# Altium PCB ov_ftdi.PcbDoc (part 1 of 3)
Units mm, origin at the board's own origin, x right, y up, seen from the top; angles counter-clockwise.
Board outline 70.64 x 125.22 mm, 4 copper layers (Top Layer, Ground, Power, Bottom Layer), stack 1.565 mm thick; 150 components, 161 nets, 670 pads, 245 vias.
Unrouted connection lines stored in the file: 2.
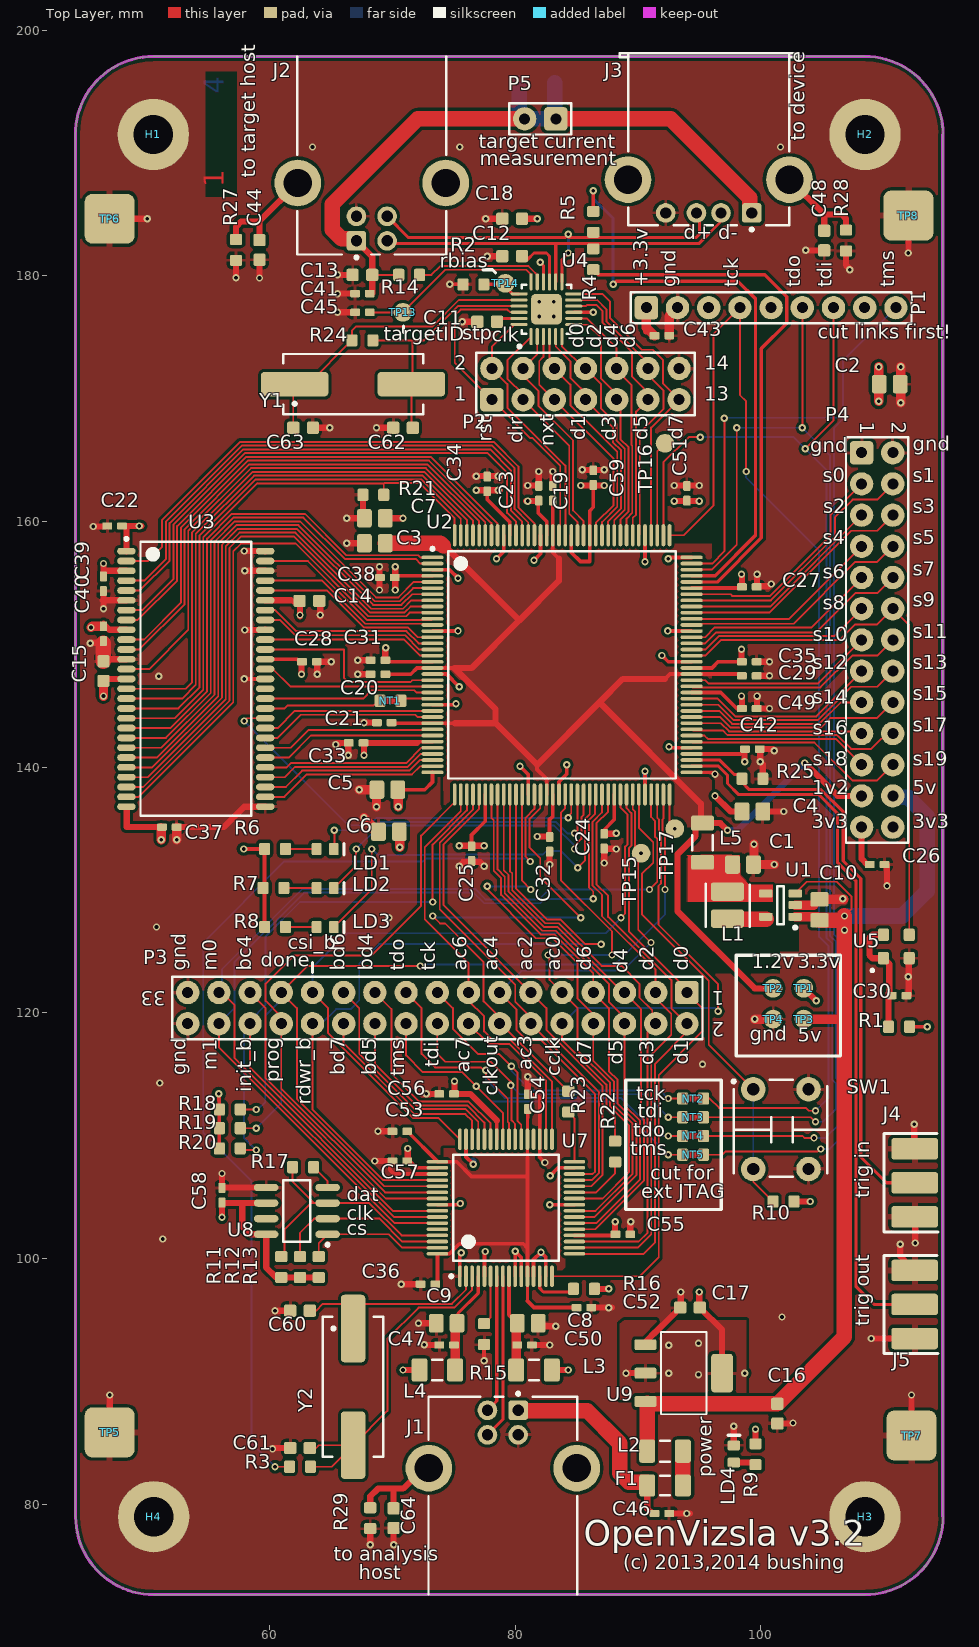
[diagram p0: Top Layer view]
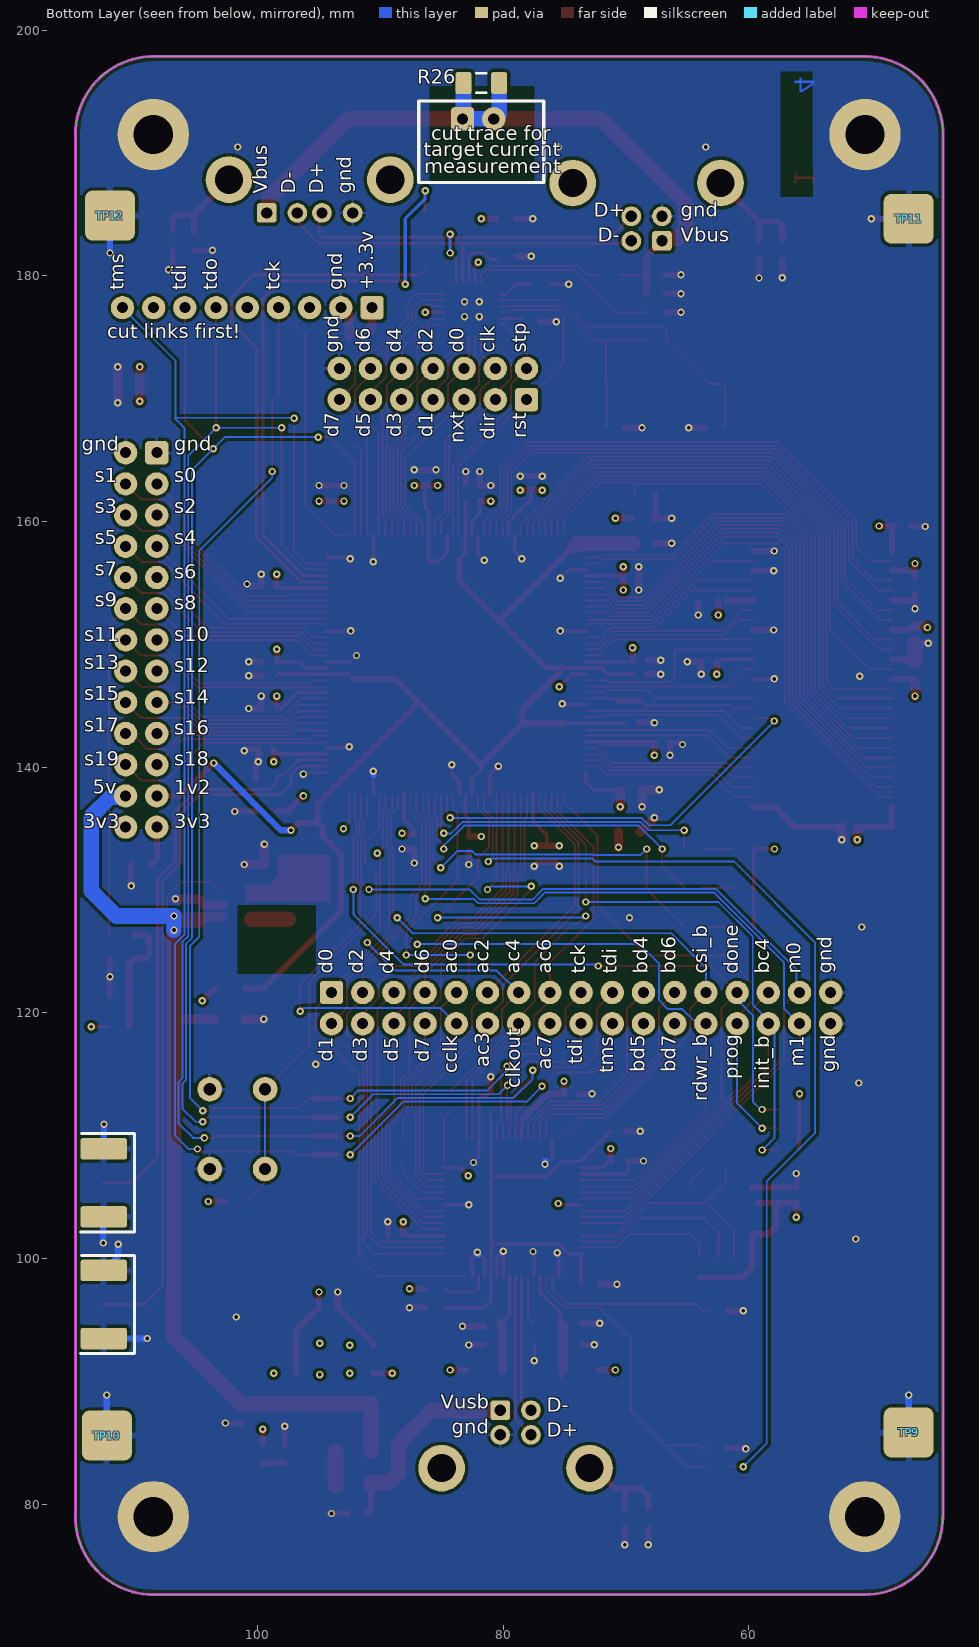
[diagram p1: Bottom Layer view, seen from below]
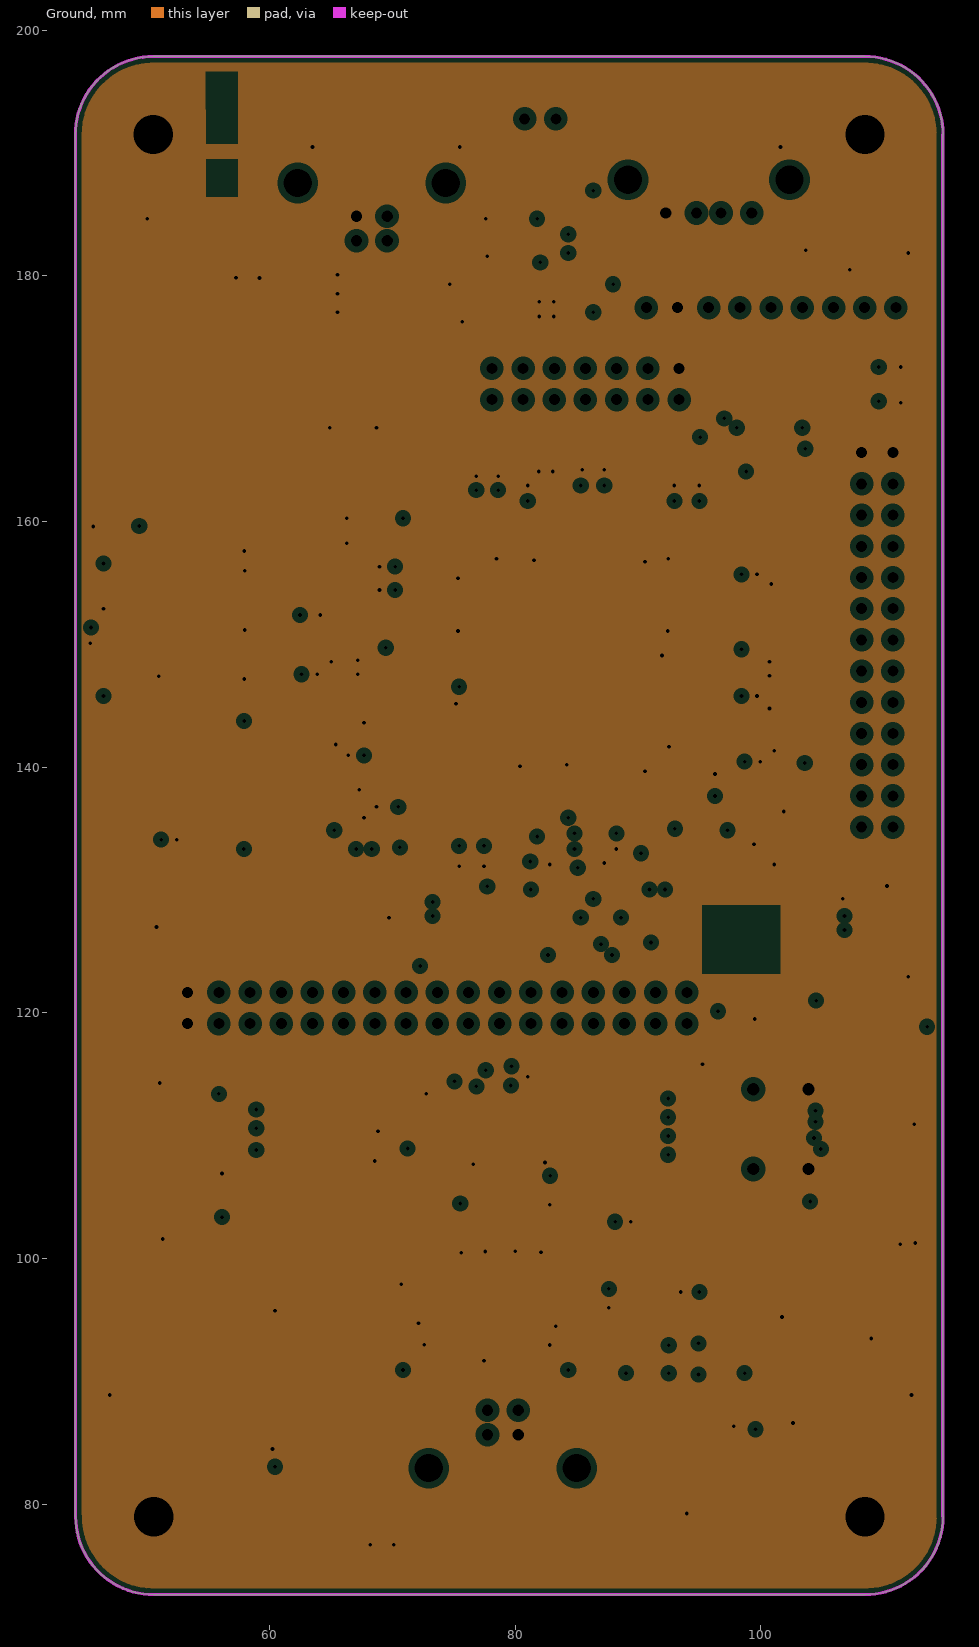
[diagram p2: Ground, clearances drawn from the general rule]
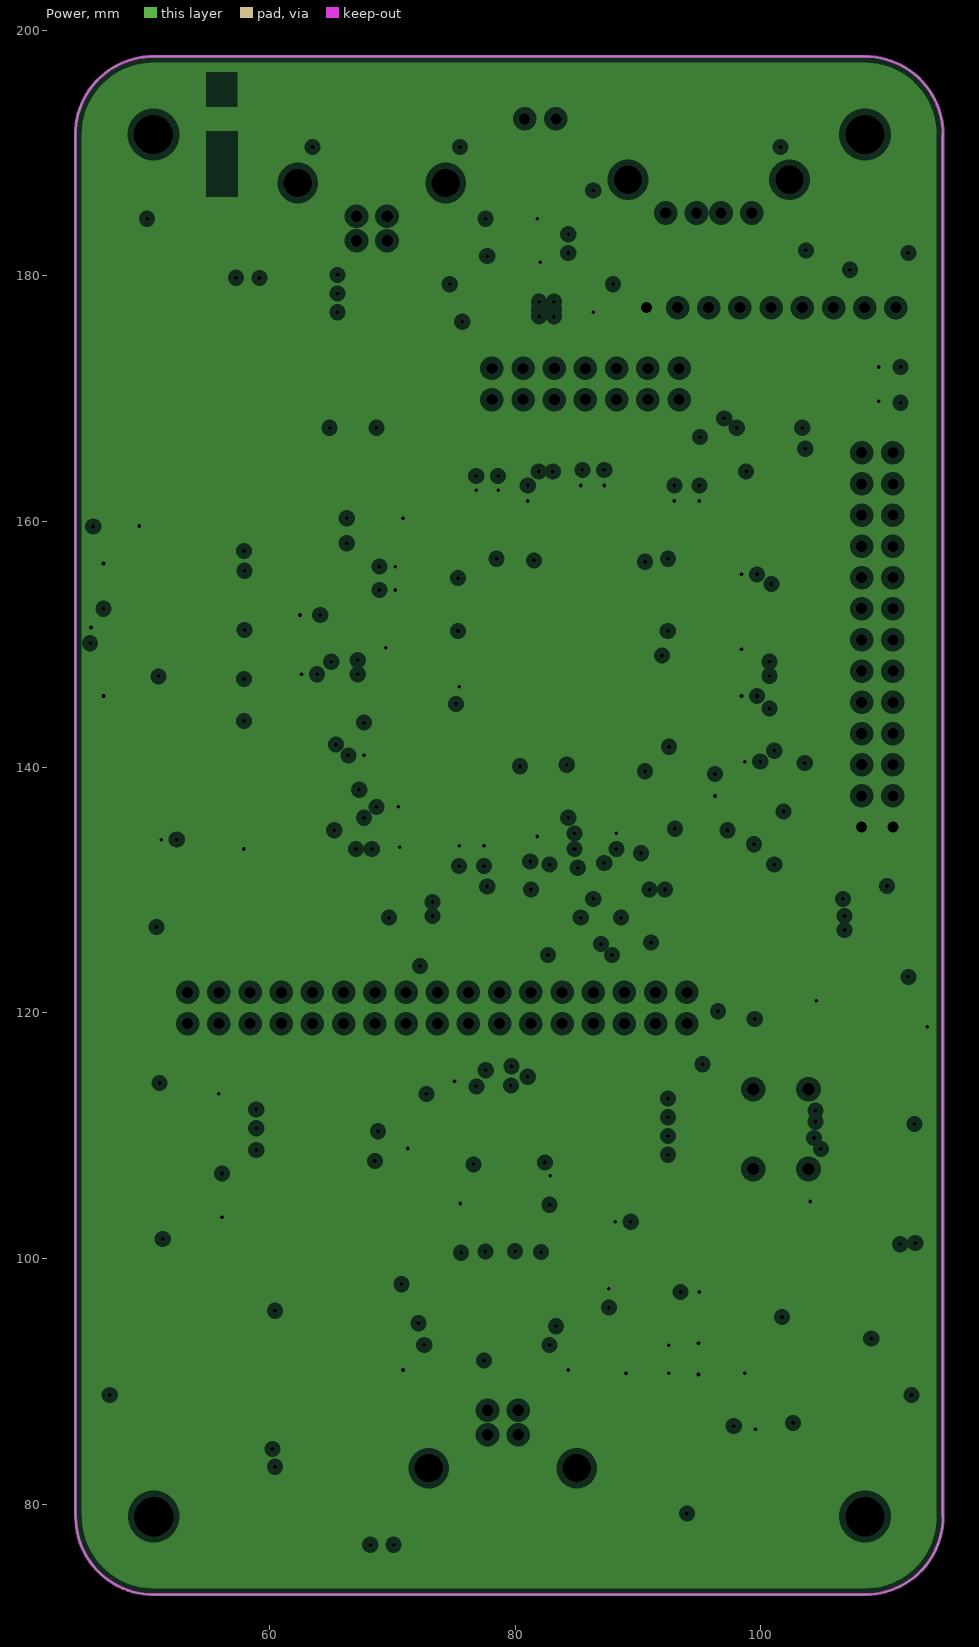
[diagram p3: Power, clearances drawn from the general rule]

## Layer stack, top to bottom
Top Solder: solder mask 0.0102, Solder Resist, Dk 3.5
Top Layer: signal copper 0.0356
Dielectric1: prepreg 0.2032, FR-4, Dk 4.8
Ground: plane copper 0.0356, net GND
Dielectric3: core 1.016, FR-4, Dk 4.8
Power: plane copper 0.0356, net +3.3V
Dielectric2: prepreg 0.2032, FR-4, Dk 4.8
Bottom Layer: signal copper 0.0356
Bottom Solder: solder mask 0.0102, Solder Resist, Dk 3.5

## Board outline
44.196,78.994 44.196,191.491 cw(c50.546,191.516) 50.546,197.866 108.458,197.866 cw(c108.483,191.516) 114.833,191.516 114.808,191.516 114.808,79.019 114.833,79.019 cw(c108.483,78.994) 108.483,72.644 50.596,72.644 cw(c50.571,78.994)

## Design rules (kind name [scope] priority, off if disabled: settings)
Clearance "Poly clearance" [All vs IsRegion] p1: gap=0.254 ignorepadtopadclearanceinfootprint=FALSE except(0: Arc-Hole Track-Hole SMDPad-Hole THPad-Hole Via-Hole Fill-Hole Poly-Hole Region-Hole Text-Hole)
Clearance [All] p2: gap=0.152 ignorepadtopadclearanceinfootprint=FALSE except(0: Arc-Hole Track-Hole SMDPad-Hole THPad-Hole Via-Hole Fill-Hole Poly-Hole Region-Hole Text-Hole)
DiffPairsRouting [All] p1: maxlimit=0.254 minlimit=0.127 mostfreqgap=0.254 toplayer_minwidth=0.381 toplayer_maxwidth=0.381 toplayer_prefwidth=0.381 bottomlayer_minwidth=0.381 bottomlayer_maxwidth=0.381 bottomlayer_prefwidth=0.381 maxuncoupledlength=12.7
FabricationTestPointUsage [All] p1 off: valid=0 allowmultiple=FALSE
FabricationTestpoint [All] p1 off: side=3 testpointundercomponent=TRUE minsize=1.016 maxsize=2.54 preferedsize=1.524 minholesize=0 maxholesize=1.016 preferedholesize=0.813 testpointgrid=0.025 allowsidetop=TRUE allowsidebottom=TRUE usegrid=TRUE gridtolerance=0
HoleSize [All] p1: absolutevalues=TRUE maxlimit=3.81 minlimit=0.025 maxpercent=80.000 minpercent=20.000
MinimumSolderMaskSliver [All] p1: minsoldermaskwidth=0.076
PlaneClearance [All] p1: clearance=0.508
PlaneConnect "PlaneConnect via" [IsVia] p1: planeconnectstyle=Direct reliefexpansion=0.508 reliefentries=4 reliefconductorwidth=0.254 reliefairgap=0.254
PlaneConnect [All] p2: planeconnectstyle=Relief reliefexpansion=0.508 reliefentries=4 reliefconductorwidth=0.254 reliefairgap=0.254
PolygonConnect PolygonConnect_betterthermals [(ObjectKind = 'Pad') And ((Component = 'J4') or (Component = 'J5') or (Component = 'TP5') or (Component = 'TP6') or (Component = 'TP7') or (Component = 'TP8') or (Component = 'TP9') or (Component = 'TP10') or (Component = 'TP11') or (Component = 'TP12'))] p1: connectstyle=Relief reliefconductorwidth=0.508 reliefentries=4 polygonreliefangle="90 Angle" airgapwidth=0.254
PolygonConnect PolygonConnect_mounting_hole [(ObjectKind = 'Pad') And ((Component = 'H1')  or (Component = 'H2') or (Component = 'H3') or (Component = 'H4'))] p2: connectstyle=Direct reliefconductorwidth=0.254 reliefentries=4 polygonreliefangle="90 Angle" airgapwidth=0.254
PolygonConnect "PolygonConnect via" [IsVia] p3: connectstyle=Direct reliefconductorwidth=0.254 reliefentries=4 polygonreliefangle="90 Angle" airgapwidth=0.254
PolygonConnect "PolygonConnect C1_2 and 1.2v" [(InNet('+1.2V') OR InNet('NetC1_2'))] p4: connectstyle=Direct reliefconductorwidth=0.254 reliefentries=4 polygonreliefangle="90 Angle" airgapwidth=0.254
PolygonConnect [All] p5: connectstyle=Relief reliefconductorwidth=0.254 reliefentries=4 polygonreliefangle="90 Angle" airgapwidth=0.254
RoomDefinition "FPGA power v3" [InComponentClass('FPGA power v3')] p1 off: confinementstyle=ConfineIn formatcopy=TRUE lockcomponents=FALSE outline 0,0 114.427,0 114.427,198.374 0,198.374
RoomDefinition usb [InComponentClass('usb')] p2 off: confinementstyle=ConfineIn formatcopy=TRUE lockcomponents=FALSE outline 70.485,107.569 98.806,107.569 98.806,129.667 70.485,129.667
RoomDefinition "RAM and target USB" [InComponentClass('RAM and target USB')] p3 off: confinementstyle=ConfineIn formatcopy=TRUE lockcomponents=FALSE outline 51.816,123.571 124.841,123.571 124.841,166.116 51.816,166.116
RoomDefinition power [InComponentClass('power')] p4 off: confinementstyle=ConfineIn formatcopy=TRUE lockcomponents=FALSE outline 115.443,104.14 153.289,104.14 153.289,122.301 115.443,122.301
RoomDefinition fpga [InComponentClass('fpga')] p5 off: confinementstyle=ConfineIn formatcopy=TRUE lockcomponents=FALSE outline 53.721,77.724 143.383,77.724 143.383,167.894 53.721,167.894
RoutingVias [All] p1: holewidth=0.3 width=0.6 viastyle="Through Hole" minholewidth=0.3 minwidth=0.6 maxholewidth=0.3 maxwidth=0.6
SilkToSilkClearance [All] p1: silktosilkclearance=0.203
SilkToSolderMaskClearance SilkscreenOverSoldermask [All] p1: minsilkscreentomaskgap=0.102 clearancetoexposedcopper=FALSE
SolderMaskExpansion SolderMaskExpansion_via [IsVia] p1: expansion=0 istentingtop=FALSE
SolderMaskExpansion [All] p2: expansion=0.102 istentingtop=FALSE
Width "usb width" [InNetClass('USB')] p1: maxlimit=0.305 minlimit=0.152 preferedwidth=0.152 minimp=80.000000 maximp=110.000000 favimp=90.000000
Width [All] p2: maxlimit=1.27 minlimit=0.152 preferedwidth=0.152 minimp=50.000000 maximp=50.000000 favimp=50.000000
21 further rules are at their usual default settings.

## Classes and differential pairs
net class Power: +1.2V +1.8V +3.3V +5V GND TARGETVBUS VPHY VPLL VUSB
component class usb: C8 C9 C36 C46 C47 C50 C52 C53 C54 C55 C56 C57 C58 C60 C61 C64 J1 L3 L4 NT2 NT3 NT4 NT5 P3 R11 R12 R13 R15 R16 R17 R18 R19 R20 R21 R22 R23 R29 U7 U8 Y2
component class "RAM and target USB": C11 C12 C13 C14 C15 C18 C22 C28 C37 C39 C40 C41 C44 C45 C48 C62 C63 J2 J3 NT1 P2 P5 R2 R4 R5 R14 R24 R26 R27 R28 TP13 TP14 U3 U4 Y1
component class power: C1 C10 C16 C17 F1 L1 L2 L5 TP1 TP2 TP3 TP4 TP5 TP6 TP7 TP8 TP9 TP10 TP11 TP12 U1 U9
component class fpga: C30 J4 J5 LD1 LD2 LD3 LD4 P1 P4 R1 R3 R6 R7 R8 R9 R10 R25 SW1 TP15 TP16 TP17 U2 U5
component class "FPGA power v3": C2 C3 C4 C5 C6 C7 C19 C20 C21 C23 C24 C25 C26 C27 C29 C31 C32 C33 C34 C35 C38 C42 C43 C49 C51 C59 H1 H2 H3 H4
net class USB: TARGETD_N TARGETD_P TARGETDTAP_N TARGETDTAP_P
differential pair USB: +USB_P -USB_N
differential pair TARGETD: +TARGETD_P -TARGETD_N
differential pair TARGETDTAP: +TARGETDTAP_P -TARGETDTAP_N

## Components (designator, comment, footprint, x,y, rotation, side; value= is the part's Value field where it differs from the comment)
C1 "Cap Semi" CAPC2012N 98.552,132.08 r180 top value=10uF
C2 "Cap Semi" CAPC2012N 110.49,171.196 r180 top value=10uF
C3 "Cap Semi" CAPC2012N 68.58,158.242 r0 top value=10uF
C4 "Cap Semi" CAPC2012N 99.314,136.398 r180 top value=10uF
C5 "Cap Semi" CAPC2012N 69.596,138.176 r0 top value=10uF
C6 "Cap Semi" CAPC2012N 69.723,134.747 r0 top value=10uF
C7 "Cap Semi" CAPC2012N 68.58,160.274 r0 top value=10uF
C8 "Cap Semi" CAPC2012N 81.026,94.742 r180 top value=4.7uF
C9 "Cap Semi" CAPC2012N 74.422,94.742 r0 top value=4.7uF
C10 "Cap Semi" CAPC2012N 104.775,128.397 r270 top value=4.7uF
C11 "Cap Semi" CAPC1608N 77.724,176.276 r180 top value=1uF
C12 "Cap Semi" CAPC1608N 79.756,181.61 r180 top value=1uF
C13 "Cap Semi" CAPC1608N 67.564,180.086 r0 top value=1uF
C14 "Cap Semi" CAPC1608N 63.246,153.543 r180 top value=1uF
C15 "Cap Semi" CAPC1608N 46.482,147.828 r270 top value=1uF
C16 "Cap Semi" CAPC1608N 101.346,87.376 r90 top value=1uF
C17 "Cap Semi" CAPC1608N 94.234,96.012 r0 top value=1uF
C18 "Cap Semi" CAPC1608N 79.756,184.658 r180 top value=1uF
C19 "Cap Semi" CAPC1005N 83.058,162.306 r270 top value=0.1uF
C20 "Cap Semi" CAPC1005N 68.834,147.574 r0 top value=0.1uF
C21 "Cap Semi" CAPC1005N 69.342,143.637 r0 top value=0.1uF
C22 "Cap Semi" CAPC1005N 47.396,159.639 r0 top value=0.1uF
C23 "Cap Semi" CAPC1005N 81.915,162.306 r270 top value=0.1uF
C24 "Cap Semi" CAPC1005N 87.249,133.985 r90 top value=0.1uF
C25 "Cap Semi" CAPC1005N 76.454,132.969 r90 top value=0.1uF
C26 "Cap Semi" CAPC1005N 109.474,132.08 r180 top value=0.1uF
C27 "Cap Semi" CAPC1005N 99.06,154.686 r180 top value=0.1uF
C28 "Cap Semi" CAPC1005N 63.246,148.59 r180 top value=0.1uF
C29 "Cap Semi" CAPC1005N 99.06,147.447 r180 top value=0.1uF
C30 "Cap Semi" CAPC1005N 111.252,121.412 r180 top value=0.1uF
C31 "Cap Semi" CAPC1005N 68.834,148.717 r0 top value=0.1uF
C32 "Cap Semi" CAPC1005N 82.804,133.731 r90 top value=0.1uF
C33 "Cap Semi" CAPC1005N 67.056,141.986 r0 top value=0.1uF
C34 "Cap Semi" CAPC1005N 77.724,163.068 r270 top value=0.1uF
C35 "Cap Semi" CAPC1005N 99.06,148.59 r180 top value=0.1uF
C36 "Cap Semi" CAPC1005N 72.898,97.917 r0 top value=0.1uF
C37 "Cap Semi" CAPC1005N 51.841,135.128 r180 top value=0.1uF
C38 "Cap Semi" CAPC1005N 69.596,155.448 r0 top value=0.1uF
C39 "Cap Semi" CAPC1005N 46.482,154.94 r90 top value=0.1uF
C40 "Cap Semi" CAPC1005N 46.482,150.876 r90 top value=0.1uF
C41 "Cap Semi" CAPC1005N 67.564,178.562 r0 top value=0.1uF
C42 "Cap Semi" CAPC1005N 99.314,141.478 r180 top value=0.1uF
C43 "Cap Semi" CAPC1005N 91.948,175.133 r180 top value=0.1uF
C44 "Cap Semi" CAPC1608N 59.182,182.118 r90 top value=0.1uF
C45 "Cap Semi" CAPC1005N 67.564,177.038 r180 top value=0.1uF
C46 "Cap Semi" CAPC1005N 91.948,79.248 r180 top value=0.1uF
C47 "Cap Semi" CAPC1005N 74.422,92.964 r0 top value=0.1uF
C48 "Cap Semi" CAPC1608N 105.156,182.88 r90 top value=0.1uF
C49 "Cap Semi" CAPC1005N 99.06,144.78 r180 top value=0.1uF
C50 "Cap Semi" CAPC1005N 80.772,92.964 r180 top value=0.1uF
C51 "Cap Semi" CAPC1005N 93.98,162.306 r270 top value=0.1uF
C52 "Cap Semi" CAPC1005N 85.598,96.012 r180 top value=0.1uF
C53 "Cap Semi" CAPC1005N 70.612,110.363 r0 top value=0.1uF
C54 "Cap Semi" CAPC1005N 81.026,112.776 r270 top value=0.1uF
C55 "Cap Semi" CAPC1005N 88.773,101.981 r180 top value=0.1uF
C56 "Cap Semi" CAPC1005N 74.422,113.411 r0 top value=0.1uF
C57 "Cap Semi" CAPC1005N 70.612,107.95 r0 top value=0.1uF
C58 "Cap Semi" CAPC1005N 56.134,105.156 r270 top value=0.1uF
C59 "Cap Semi" CAPC1005N 86.36,163.576 r270 top value=0.1uF
C60 "Cap Semi" CAPC1608N 62.484,95.758 r0 top value=18pF
C61 "Cap Semi" CAPC1608N 62.484,84.582 r0 top value=18pF
C62 "Cap Semi" CAPC1608N 70.866,167.64 r0 top value=18pF
C63 "Cap Semi" CAPC1608N 62.738,167.64 r180 top value=18pF
C64 "Cap Semi" CAPC1608N 70.104,78.867 r90 top value=0.1uF
F1 "500mA resettable polyfuse" RESC3216N 92.202,81.534 r0 top value=0
H1 "MHole3.2mm" "MOUNTING HOLE"#1 50.546,191.516 r0 top
H2 "MHole3.2mm" "MOUNTING HOLE"#2 108.458,191.516 r0 top
H3 "MHole3.2mm" "MOUNTING HOLE"#2 108.458,78.994 r0 top
H4 "MHole3.2mm" "MOUNTING HOLE"#2 50.546,78.994 r0 top
J1 "1-1470156-1" 1-1470156 78.994,72.644 r270 top value=61729-1011BLF
J2 "1-1470156-1" 1-1470156 68.326,197.866 r90 top value=61729-1011BLF
J3 "787616-1" 787616 95.758,198.12 r90 top value=E27-AC54-100
J4 "Trigger in" EMPCB.SMAFSTJ.C.HT 112.522,106.172 r90 top
J5 "Trigger out" EMPCB.SMAFSTJ.C.HT 112.522,96.266 r90 top
L1 "3x3mm power inductor" "3X3MM INDUCTOR" 97.282,128.778 r90 top value=4.7uH
L2 "ferrite bead" INDC3216AN 92.202,84.328 r0 top value=0
L3 "ferrite bead" INDC3216AN 81.534,90.932 r180 top value=0
L4 "ferrite bead" INDC3216AN 73.66,90.932 r0 top value=0
L5 "ferrite bead" INDC3216N 95.25,133.858 r270 top value=0
LD1 "RED-LED" "LED 0603" 64.516,133.35 r90 top value=red
LD2 "RED-LED" "LED 0603" 64.516,130.175 r90 top value=yel
LD3 "RED-LED" "LED 0603" 64.516,127 r90 top value=grn
LD4 "GREEN-LED" "LED 0603" 97.79,84.074 r180 top value=green
NT1 "Net Tie2" "NetTie 0603" 69.85,145.415 r180 top net-tie
NT2 "Net Tie2" "NetTie 0603" 94.488,113.03 r0 top net-tie
NT3 "Net Tie2" "NetTie 0603" 94.488,111.506 r0 top net-tie
NT4 "Net Tie2" "NetTie 0603" 94.488,109.982 r0 top net-tie
NT5 "Net Tie2" "NetTie 0603" 94.488,108.458 r0 top net-tie
P1 "Header 9" HDR1X9 90.678,177.419 r0 top
P2 "Header 7X2" HDR2X7 78.105,169.926 r0 top
P3 "Header 17X2" HDR2X17 93.98,121.666 r180 top
P4 "Header 13X2" HDR2X13 108.204,165.608 r270 top
P5 "Current measurement" HDR1X2 83.312,192.786 r180 top
R1 "Res Semi" RESC1608N 111.252,118.872 r180 top value=10
R2 "Res Semi" RESC1608N 76.6,179.3 r0 top value=8.06K
R3 "Res Semi" RESC1608N 62.484,83.058 r180 top value=100
R4 "Res Semi" RESC1608N 86.36,181.356 r270 top value=1K
R5 "Res Semi" RESC1608N 86.36,184.404 r90 top value=1K
R6 "Res Semi" RESC1608N 60.452,133.35 r180 top value=330
R7 "Res Semi" RESC1608N 60.325,130.175 r180 top value=330
R8 "Res Semi" RESC1608N 60.452,127 r180 top value=330
R9 "Res Semi" RESC1608N 99.568,84.074 r90 top value=330
R10 "Res Semi" RESC1608N 101.854,104.648 r0 top value=10K
R11 "Res Semi" RESC1608N 60.96,99.314 r270 top value=10K
R12 "Res Semi" RESC1608N 62.484,99.314 r270 top value=10K
R13 "Res Semi" RESC1608N 64.008,99.314 r270 top value=10K
R14 "Res Semi" RESC1608N 71.374,180.086 r180 top value=10K
R15 "Res Semi" RESC1608N 77.47,93.853 r270 top value="12K 1%"
R16 "Res Semi" RESC1608N 85.598,97.536 r180 top value=2.2K
R17 "Res Semi" RESC1608N 62.738,107.442 r180 top value=2.2K
R18 "Res Semi" RESC1608N 56.769,112.141 r180 top value=330
R19 "Res Semi" RESC1608N 56.769,110.617 r0 top value=10K
R20 "Res Semi" RESC1608N 56.769,108.966 r0 top value=10K
R21 "Res Semi" RESC1608N 68.453,162.179 r0 top value=10K
R22 "Res Semi" RESC1608N 88.138,108.712 r90 top value=33
R23 "Res Semi" RESC1608N 84.328,112.776 r90 top value=33
R24 "Res Semi" RESC1608N 67.564,174.752 r180 top value=1M
R25 "Res Semi" RESC1608N 99.314,139.065 r0 top value=50
R26 "Res Semi" RESC3216N 81.788,195.707 r0 bottom value="DNP (0)"
R27 "Res Semi" RESC1608N 57.277,182.118 r270 top value=1M
R28 "Res Semi" RESC1608N 106.934,182.88 r270 top value=1M
R29 "Res Semi" RESC1608N 68.199,78.867 r270 top value=1M
SW1 "4pin button" TL1105 103.886,113.792 r270 top value="TL1105LF160Q or TL1105F160Q"
TP1 "3.3v" testpoint-60mil 103.5,122 r90 top
TP2 "1.2v" testpoint-60mil 101,122 r90 top
TP3 "5v" testpoint-60mil 103.5,119.5 r0 top
TP4 "gnd" testpoint-60mil 101,119.5 r270 top
TP5 "" "ground pad" 46.99,85.852 r0 top
TP6 "" "ground pad" 46.99,184.658 r0 top
TP7 "" "ground pad" 112.268,85.598 r0 top
TP8 "" "ground pad" 112.014,184.912 r0 top
TP9 "" "ground pad" 46.99,85.852 r180 bottom
TP10 "" "ground pad" 112.268,85.598 r180 bottom
TP11 "" "ground pad" 46.99,184.658 r180 bottom
TP12 "" "ground pad" 112.014,184.912 r180 bottom
TP13 "TP14" testpoint-60mil 70.866,177.038 r180 top
TP14 "TP14" testpoint-60mil 79.2,179.4 r180 top
TP15 "TP14" testpoint-60mil 90.25,133 r90 top
TP16 "TP14" testpoint-60mil 92.202,166.37 r90 top
TP17 "TP14" testpoint-60mil 93,135 r90 top
U1 "LM3670MF-1.2/NOPB" SOT23-5AN 101.6,128.778 r180 top value=LM3670MF-1.2
U2 "XC6SLX9-3TQG144C" TQG144_N 83.82,148.336 r0 top
U3 "MT48LC16M16A2P-75" TSOP2-54_N 54,147.193 r0 top
U4 "USB3343" "SMSC USB334X QFN24" 82.55,177.292 r90 top
U5 "" "ASEMB 3.2x2.5 oscillator" 109.982,124.46 r0 top value=50MHz
U7 "Component_1" SQFP50P1200X1200X180-64N 79.248,104.14 r90 top value=FT2232H
U8 "M93C46WMN1" SOP8_N 62.23,103.886 r180 top
U9 "TLV1117LV33" DCY4 93.726,90.678 r270 top
Y1 "26MHz" HC49/4H_SMX 66.802,171.196 r0 top value="26 MHz"
Y2 "12MHz" HC49/4H_SMX 66.802,89.56 r270 top value="12 MHz"

## Footprints (in the part's own frame and the unit in brackets; to place one, negate y for a bottom-side part, rotate by r counter-clockwise, add the part's x,y. Pads: shape width x height; smd on the part's side, far side on the other; paste and mask are expansions set on the pad)
1-1470156 [mm] "Connector; USB1.1, Type B, Thru-Hole; 4 Position; Right Angle"
  rrect30% 1.6x1.6 hole 0.92: 1(-15.01,1.25)
  round 1.6 hole 0.92: 2(-15.01,-1.25) 3(-13.01,-1.25) 4(-13.01,1.25)
  round 3.8 hole 2.3: 5(-10.3,6.02) 6(-10.3,-6.02)
  silkscreen extent -16.48,-6.05 -0.02,6.05
"3X3MM INDUCTOR" [mm] "3x3mm inductor"
  rrect30% 1.5x2.7 smd: 1(-1.1,0) 2(1.1,0)
  silkscreen extent -1.78,-1.8 1.72,1.78, body extent -1.63,-1.43 1.53,1.53, height 3
787616 [mm] "Connector; USB1.1, Type A, Thru-Hole; 4 Position; Right Angle"
  rrect30% 1.6x1.6 hole 0.92: 1(-12.99,-3.5)
  round 1.6 hole 0.92: 2(-12.99,-1) 3(-12.99,1) 4(-12.99,3.5)
  round 3.8 hole 2.3: 5(-10.28,6.57) 6(-10.28,-6.57)
  silkscreen extent -14.46,-7.25 0,7.25
"ASEMB 3.2x2.5 oscillator" [mm]
  rrect30% 0.9x1 smd: 1(0,0) 2(2.1,0) 3(2.1,1.9) 4(0,1.9)
  silkscreen extent -1,-1.1 -0.8,-0.9
CAPC1005N [mm] "Chip Capacitor, Body 1.0x0.5mm, IPC Medium Density"
  rrect30% 0.8x0.6 smd: 1(-0.6,0) 2(0.6,0)
  body extent -0.55,-0.3 0.55,0.3, height 0.6
CAPC1608N [mm]
  rrect30% 1x1 smd: 1(-0.8,0) 2(0.8,0)
  body extent -0.87,-0.48 0.87,0.48, height 0.85
CAPC2012N [mm] "Chip Capacitor, Body 2.0x1.3mm, IPC Medium Density"
  rrect30% 1.2x1.5 smd: 1(-0.85,0) 2(0.85,0)
  body extent -1.1,-0.72 1.1,0.72, height 1.1
DCY4 [mil]
  rrect30% 35x69.5 smd: 1(-91,-122.75) 2(0,-122.75) 3(91,-122.75)
  rrect30% 124x69.5 smd: 4(0,122.75)
  silkscreen extent -132,-73 132,73
EMPCB.SMAFSTJ.C.HT [mm]
  rrect25% 1.75x3.8 smd: 1(0,0) 2(-2.77,0) 3(2.77,0)
  rrect25% 1.75x3.8 smd far side: 4(-2.77,0) 5(2.77,0)
  silkscreen extent -4,-1.9 4,2.5
"ground pad" [mil]
  rrect30% 160x160 smd: 1(0,0)
HC49/4H_SMX [mm] "Surface Mount Quartz Crystal; Body 13.4 (inc. leads) x 4.9 mm (LxW max)"
  rrect30% 5.5x2 smd: 1(-4.75,0) 2(4.75,0)
  silkscreen extent -5.7,-2.45 5.7,2.45
HDR1X2 [mm] "Connector; Header; 2 Position"
  rrect30% 1.9x1.9 hole 0.9: 1(0,0)
  round 1.9 hole 0.9: 2(2.54,0)
  silkscreen extent -1.27,-1.27 3.81,1.27
HDR1X9 [mm] "Connector; Header; 9 Position"
  rrect30% 1.9x1.9 hole 0.9: 1(0,0)
  round 1.9 hole 0.9: 2(2.54,0) 3(5.08,0) 4(7.62,0) 5(10.16,0) 6(12.7,0) 7(15.24,0) 8(17.78,0) 9(20.32,0)
  silkscreen extent -1.27,-1.27 21.59,1.27
HDR2X7 [mm] "Connector; Header; 7x2 Position"
  rrect30% 1.9x1.9 hole 0.9: 1(0,0)
  round 1.9 hole 0.9: 2(0,2.54) 3(2.54,0) 4(2.54,2.54) 5(5.08,0) 6(5.08,2.54) 7(7.62,0) 8(7.62,2.54) 9(10.16,0) 10(10.16,2.54) 11(12.7,0) 12(12.7,2.54) 13(15.24,0) 14(15.24,2.54)
  silkscreen extent -1.27,-1.27 16.51,3.81
HDR2X13 [mm] "Connector; Header; 13x2 Position"
  rrect30% 1.9x1.9 hole 0.9: 1(0,0)
  round 1.9 hole 0.9: 2(0,2.54) 3(2.54,0) 4(2.54,2.54) 5(5.08,0) 6(5.08,2.54) 7(7.62,0) 8(7.62,2.54) 9(10.16,0) 10(10.16,2.54) 11(12.7,0) 12(12.7,2.54) 13(15.24,0) 14(15.24,2.54) 15(17.78,0) 16(17.78,2.54) 17(20.32,0) 18(20.32,2.54) 19(22.86,0) 20(22.86,2.54) 21(25.4,0) 22(25.4,2.54) 23(27.94,0) 24(27.94,2.54) 25(30.48,0) 26(30.48,2.54)
  silkscreen extent -1.27,-1.27 31.75,3.81
HDR2X17 [mm] "Connector; Header; 17x2 Position"
  rrect30% 1.9x1.9 hole 0.9: 1(0,0)
  round 1.9 hole 0.9: 2(0,2.54) 3(2.54,0) 4(2.54,2.54) 5(5.08,0) 6(5.08,2.54) 7(7.62,0) 8(7.62,2.54) 9(10.16,0) 10(10.16,2.54) 11(12.7,0) 12(12.7,2.54) 13(15.24,0) 14(15.24,2.54) 15(17.78,0) 16(17.78,2.54) 17(20.32,0) 18(20.32,2.54) 19(22.86,0) 20(22.86,2.54) 21(25.4,0) 22(25.4,2.54) 23(27.94,0) 24(27.94,2.54) 25(30.48,0) 26(30.48,2.54) 27(33.02,0) 28(33.02,2.54) 29(35.56,0) 30(35.56,2.54) 31(38.1,0) 32(38.1,2.54) 33(40.64,0) 34(40.64,2.54)
  silkscreen extent -1.27,-1.27 41.91,3.81
INDC3216AN [mm] "Chip Inductor, Body 3.2x1.6mm, IPC Medium Density"
  rrect30% 1.3x1.9 smd: 1(-1.45,0) 2(1.45,0)
  silkscreen extent -0.4,-0.85 0.4,0.85, body extent -1.7,-0.9 1.7,0.9, height 1.3
INDC3216N [mm] "Chip Inductor, Body 3.2x1.6mm, IPC Medium Density"
  rrect30% 1.2x1.9 smd: 1(-1.6,0) 2(1.6,0)
  silkscreen extent -0.6,-0.85 0.6,0.85, body extent -1.75,-0.95 1.75,0.95, height 1.9
"LED 0603" [mm]
  rrect30% 1x0.8 smd: A(-0.01,0.68) C(-0.01,-0.72)
  silkscreen extent -0.5,-1.55 0.45,-1.55, body extent -0.39,-0.83 0.4,0.79, height 0.75
"MOUNTING HOLE"#1 [mm] "mounting hole"
  round 5.8 hole 3.2: 1(0,0)
  round 3.2 on Mech2: 1(0,0)
  body extent -3.8,-3.7 3.7,3.8, height 2.33
"MOUNTING HOLE"#2 [mm] "mounting hole"
  round 5.8 hole 3.2: 1(0.025,0)
  round 3.2 on Mech2: 1(0.025,0)
  body extent -3.8,-3.7 3.7,3.8, height 2.33
"NetTie 0603" [mm] "0603-footprint Net Tie"
  rrect30% 0.9x1 smd paste-2.54: 1(-0.85,0) 2(0.85,0)
  Top Layer lines w0.508: 0.85,0 -0.85,0
RESC1608N [mm] "Chip Resistor, Body 1.6x0.8mm, IPC Medium Density"
  rrect30% 0.9x1 smd: 1(-0.85,0) 2(0.85,0)
  body extent -0.85,-0.48 0.85,0.48, height 0.6
RESC3216N [mm] "Chip Resistor, Body 3.2x1.6mm, IPC Medium Density"
  rrect30% 1.3x1.8 smd: 1(-1.45,0) 2(1.45,0)
  silkscreen extent -0.4,-0.8 0.4,0.8, body extent -1.68,-0.87 1.68,0.87, height 0.71
"SMSC USB334X QFN24" [mm] "SMSC USB334x QFN24"
  oval 1.4x0.25 smd mask+0.07: 1(-2.225,1.25) 2(-2.225,0.75) 3(-2.225,0.25) 4(-2.225,-0.25) 5(-2.225,-0.75) 6(-2.225,-1.25) 13(2.225,-1.25) 14(2.225,-0.75) 15(2.225,-0.25) 16(2.225,0.25) 17(2.225,0.75) 18(2.225,1.25)
  oval 0.25x1.4 smd mask+0.07: 7(-1.25,-2.225) 8(-0.75,-2.225) 9(-0.25,-2.225) 10(0.25,-2.225) 11(0.75,-2.225) 12(1.25,-2.225) 19(1.25,2.225) 20(0.75,2.225) 21(0.25,2.225) 22(-0.25,2.225) 23(-0.75,2.225) 24(-1.25,2.225)
  rrect30% 2.5x2.5 smd mask+0.07: 25(0,0)
  silkscreen extent -3.15,-2 2,2.32, body extent -1.97,-1.97 1.97,1.97, height 1
SOP8_N [mm] "8-Pin Small Outline Integrated Circuit 1.27 mm Pitch, IPC Medium Density"
  oval 2x0.6 smd: 1(-2.5,1.905) 2(-2.5,0.635) 3(-2.5,-0.635) 4(-2.5,-1.905) 5(2.5,-1.905) 6(2.5,-0.635) 7(2.5,0.635) 8(2.5,1.905)
  silkscreen extent -2.63,-2.5 1.1,2.88, body extent -2,-2.5 2,2.5, height 1.75
SOT23-5AN [mm] "SOT23, 5-Leads, Body 2.9x1.6mm, Pitch 0.95mm, Lead Span 2.8mm, IPC Medium Density"
  rrect30% 1.1x0.65 smd: 1(-1.2,0.95) 2(-1.2,0) 3(-1.2,-0.95) 4(1.2,-0.95) 5(1.2,0.95)
  silkscreen extent -1.33,-1.55 0.25,1.95, body extent -0.9,-1.55 0.9,1.55, height 1.45
SQFP50P1200X1200X180-64N [mm] "SQFP, 64-Leads, Body 12.2x12.2mm (max), Pitch 0.50mm, IPC Medium Density"
  oval 1.75x0.3 smd: 1(-5.575,3.75) 2(-5.575,3.25) 3(-5.575,2.75) 4(-5.575,2.25) 5(-5.575,1.75) 6(-5.575,1.25) 7(-5.575,0.75) 8(-5.575,0.25) 9(-5.575,-0.25) 10(-5.575,-0.75) 11(-5.575,-1.25) 12(-5.575,-1.75) 13(-5.575,-2.25) 14(-5.575,-2.75) 15(-5.575,-3.25) 16(-5.575,-3.75) 33(5.575,-3.75) 34(5.575,-3.25) 35(5.575,-2.75) 36(5.575,-2.25) 37(5.575,-1.75) 38(5.575,-1.25) 39(5.575,-0.75) 40(5.575,-0.25) 41(5.575,0.25) 42(5.575,0.75) 43(5.575,1.25) 44(5.575,1.75) 45(5.575,2.25) 46(5.575,2.75) 47(5.575,3.25) 48(5.575,3.75)
  oval 0.3x1.75 smd: 17(-3.75,-5.575) 18(-3.25,-5.575) 19(-2.75,-5.575) 20(-2.25,-5.575) 21(-1.75,-5.575) 22(-1.25,-5.575) 23(-0.75,-5.575) 24(-0.25,-5.575) 25(0.25,-5.575) 26(0.75,-5.575) 27(1.25,-5.575) 28(1.75,-5.575) 29(2.25,-5.575) 30(2.75,-5.575) 31(3.25,-5.575) 32(3.75,-5.575) 49(3.75,5.575) 50(3.25,5.575) 51(2.75,5.575) 52(2.25,5.575) 53(1.75,5.575) 54(1.25,5.575) 55(0.75,5.575) 56(0.25,5.575) 57(-0.25,5.575) 58(-0.75,5.575) 59(-1.25,5.575) 60(-1.75,5.575) 61(-2.25,5.575) 62(-2.75,5.575) 63(-3.25,5.575) 64(-3.75,5.575)
  silkscreen extent -5.7,-4.3 4.3,4.57, body extent -5,-5 5,5, height 1.8
testpoint-60mil [mil] "30mil testpoint"
  round 60 smd: 1(0,0)
TL1105 [mm] "E-switch tact switch"
  round 2 hole 1: 1(0,-4.5) 2(6.5,-4.5) 3(0,0) 4(6.5,0)
  silkscreen extent -0.76,-6.22 7.11,1.52
TQG144_N [mm] "Thin QFP, 144-Leads, Body 20x20mm, Pitch 0.5mm, IPC Medium Density"
  oval 1.8x0.3 smd: 1(-10.55,8.75) 2(-10.55,8.25) 3(-10.55,7.75) 4(-10.55,7.25) 5(-10.55,6.75) 6(-10.55,6.25) 7(-10.55,5.75) 8(-10.55,5.25) 9(-10.55,4.75) 10(-10.55,4.25) 11(-10.55,3.75) 12(-10.55,3.25) 13(-10.55,2.75) 14(-10.55,2.25) 15(-10.55,1.75) 16(-10.55,1.25) 17(-10.55,0.75) 18(-10.55,0.25) 19(-10.55,-0.25) 20(-10.55,-0.75) 21(-10.55,-1.25) 22(-10.55,-1.75) 23(-10.55,-2.25) 24(-10.55,-2.75) 25(-10.55,-3.25) 26(-10.55,-3.75) 27(-10.55,-4.25) 28(-10.55,-4.75) 29(-10.55,-5.25) 30(-10.55,-5.75) 31(-10.55,-6.25) 32(-10.55,-6.75) 33(-10.55,-7.25) 34(-10.55,-7.75) 35(-10.55,-8.25) 36(-10.55,-8.75) 73(10.55,-8.75) 74(10.55,-8.25) 75(10.55,-7.75) 76(10.55,-7.25) 77(10.55,-6.75) 78(10.55,-6.25) 79(10.55,-5.75) 80(10.55,-5.25) 81(10.55,-4.75) 82(10.55,-4.25) 83(10.55,-3.75) 84(10.55,-3.25) 85(10.55,-2.75) 86(10.55,-2.25) 87(10.55,-1.75) 88(10.55,-1.25) 89(10.55,-0.75) 90(10.55,-0.25) 91(10.55,0.25) 92(10.55,0.75) 93(10.55,1.25) 94(10.55,1.75) 95(10.55,2.25) 96(10.55,2.75) 97(10.55,3.25) 98(10.55,3.75) 99(10.55,4.25) 100(10.55,4.75) 101(10.55,5.25) 102(10.55,5.75) 103(10.55,6.25) 104(10.55,6.75) 105(10.55,7.25) 106(10.55,7.75) 107(10.55,8.25) 108(10.55,8.75)
  oval 0.3x1.8 smd: 37(-8.75,-10.55) 38(-8.25,-10.55) 39(-7.75,-10.55) 40(-7.25,-10.55) 41(-6.75,-10.55) 42(-6.25,-10.55) 43(-5.75,-10.55) 44(-5.25,-10.55) 45(-4.75,-10.55) 46(-4.25,-10.55) 47(-3.75,-10.55) 48(-3.25,-10.55) 49(-2.75,-10.55) 50(-2.25,-10.55) 51(-1.75,-10.55) 52(-1.25,-10.55) 53(-0.75,-10.55) 54(-0.25,-10.55) 55(0.25,-10.55) 56(0.75,-10.55) 57(1.25,-10.55) 58(1.75,-10.55) 59(2.25,-10.55) 60(2.75,-10.55) 61(3.25,-10.55) 62(3.75,-10.55) 63(4.25,-10.55) 64(4.75,-10.55) 65(5.25,-10.55) 66(5.75,-10.55) 67(6.25,-10.55) 68(6.75,-10.55) 69(7.25,-10.55) 70(7.75,-10.55) 71(8.25,-10.55) 72(8.75,-10.55) 109(8.75,10.55) 110(8.25,10.55) 111(7.75,10.55) 112(7.25,10.55) 113(6.75,10.55) 114(6.25,10.55) 115(5.75,10.55) 116(5.25,10.55) 117(4.75,10.55) 118(4.25,10.55) 119(3.75,10.55) 120(3.25,10.55) 121(2.75,10.55) 122(2.25,10.55) 123(1.75,10.55) 124(1.25,10.55) 125(0.75,10.55) 126(0.25,10.55) 127(-0.25,10.55) 128(-0.75,10.55) 129(-1.25,10.55) 130(-1.75,10.55) 131(-2.25,10.55) 132(-2.75,10.55) 133(-3.25,10.55) 134(-3.75,10.55) 135(-4.25,10.55) 136(-4.75,10.55) 137(-5.25,10.55) 138(-5.75,10.55) 139(-6.25,10.55) 140(-6.75,10.55) 141(-7.25,10.55) 142(-7.75,10.55) 143(-8.25,10.55) 144(-8.75,10.55)
  silkscreen extent -10.67,-9.25 9.25,9.57, body extent -10,-10 10,10, height 1.6
TSOP2-54_N [mm] "54-Pin Plastic Small Outline Package 0.8 mm Pitch, IPC Medium Density"
  oval 1.5x0.55 smd: 1(-5.65,10.4) 2(-5.65,9.6) 3(-5.65,8.8) 4(-5.65,8) 5(-5.65,7.2) 6(-5.65,6.4) 7(-5.65,5.6) 8(-5.65,4.8) 9(-5.65,4) 10(-5.65,3.2) 11(-5.65,2.4) 12(-5.65,1.6) 13(-5.65,0.8) 14(-5.65,0) 15(-5.65,-0.8) 16(-5.65,-1.6) 17(-5.65,-2.4) 18(-5.65,-3.2) 19(-5.65,-4) 20(-5.65,-4.8) 21(-5.65,-5.6) 22(-5.65,-6.4) 23(-5.65,-7.2) 24(-5.65,-8) 25(-5.65,-8.8) 26(-5.65,-9.6) 27(-5.65,-10.4) 28(5.65,-10.4) 29(5.65,-9.6) 30(5.65,-8.8) 31(5.65,-8) 32(5.65,-7.2) 33(5.65,-6.4) 34(5.65,-5.6) 35(5.65,-4.8) 36(5.65,-4) 37(5.65,-3.2) 38(5.65,-2.4) 39(5.65,-1.6) 40(5.65,-0.8) 41(5.65,0) 42(5.65,0.8) 43(5.65,1.6) 44(5.65,2.4) 45(5.65,3.2) 46(5.65,4) 47(5.65,4.8) 48(5.65,5.6) 49(5.65,6.4) 50(5.65,7.2) 51(5.65,8) 52(5.65,8.8) 53(5.65,9.6) 54(5.65,10.4)
  silkscreen extent -5.77,-11.15 4.5,11.52, body extent -5.08,-11.11 5.08,11.11, height 1.2

## Part data
C1 C2 C3 C4 C5 C6 C7: "Capacitor (Semiconductor SIM Model)", Rating="X7R >=6.3v", Supplier Part Number 1=81-GRM21BR61A106KE19, Tolerance=±10%, PackageReference=0805, Substitutable=yes, Supplier 1=Mouser
C8 C9 C10: library part Cap, "Capacitor", Rating="X7R >=6.3v", Supplier Part Number 1=445-1370-1-ND, Tolerance="-20%, +80%", PackageReference=0805, Substitutable=yes, Supplier 1=Digi-Key
C11 C12 C18 C19 C20 C21 C22 C23 C24 C25 C26 C27 C28 C29 C30 C31 C32 C33 C34 C35 C36 C37 C38 C39 C40 C41 C42 C43 C45 C46 C47 C49 C50 C51 C52 C53 C54 C55 C56 C57 C58 C59: "Capacitor (Semiconductor SIM Model)", Rating="X7R >=6.3v", Supplier Part Number 1=445-4703-1-ND, Tolerance=±10%, Substitutable=yes, Supplier 1=Digi-Key
  C11 C12 C18: PackageReference=0603
  C19 C20 C21 C22 C23 C24 C25 C26 C27 C28 C29 C30 C31 C32 C33 C34 C35 C36 C37 C38 C39 C40 C41 C42 C43 C45 C46 C47 C49 C50 C51 C52 C53 C54 C55 C56 C57 C58 C59: PackageReference=0402, Supplier 2=Digi-Key, Supplier Part Number 2=445-6854-1-ND
C13 C14 C15 C16 C17: "Capacitor (Semiconductor SIM Model)", Rating="X7R >=6.3v", Supplier Part Number 1=445-4703-1-ND, PackageReference=0603, Substitutable=yes, Supplier 1=Digi-Key
C44 C48 C64: library part "Cap Semi_1", "Capacitor (Semiconductor SIM Model)", Rating="X7R >=6.3v", Supplier Part Number 1=445-4703-1-ND, PackageReference=0603, Substitutable=yes, Supplier 1=Digi-Key
C60 C61 C62 C63: "Capacitor (Semiconductor SIM Model)", Rating="C0G >=6.3v", Supplier Part Number 1=445-1777-1-ND, PackageReference=0603, Substitutable=yes, Supplier 1=Digi-Key
F1: library part "Fuse 2", "Fuse", Supplier Part Number 1=576-1206L050YR, PackageReference=1206, Substitutable=yes, Supplier 1=Mouser
H1 H2 H3 H4: library part 22898, Substitutable=DNP
J1 J2: "USB 1.1, Right Angle, Thru-Hole, B Type, Receptacle, 4 Position, White", PackageReference=1-1470156, Substitutable=no
J3: "USB 1.1, Right Angle, Thru-Hole, A Type, Receptacle, 4 Position, Black", Substitutable=no
J4 J5: library part EMPCB.SMAFSTJ.C.HT, "PCB edge mount SMA jack"
L1: library part "Inductor Iron", "Magnetic-Core Inductor", Supplier Part Number 1=652-SRN3015-4R7M, PackageReference=AXIAL-0.9, Substitutable=yes, Supplier 1=Mouser
L2 L3 L4 L5: library part Inductor, "Inductor", Supplier Part Number 1=81-BLM18KG121TN1D, PackageReference=1206, Substitutable=yes, Supplier 1=Mouser
LD1 LD2 LD3: library part RED-LED-SMD, Supplier Part Number 1=755-SML-310VTT86, PackageReference=0603, Substitutable=yes, Supplier 1=Mouser
LD4: library part GREEN-LED-SMD, Supplier Part Number 1=645-598-8060-107F, PackageReference=0603, Substitutable=yes, Supplier 1=Mouser
NT1 NT2 NT3 NT4 NT5: "0603 Net Tie to connect 2 different nets", Substitutable=DNP
P1: "Header, 9-Pin", Substitutable=DNP
P2: "Header, 7-Pin, Dual row", Substitutable=DNP
P3: "Header, 17-Pin, Dual row", Substitutable=DNP
P4: "Header, 13-Pin, Dual row", LatestRevisionDate=17-Jul-2002, LatestRevisionNote="Re-released for DXP Platform.", Publisher="Altium Limited"
P5: library part "Header 2", "Header, 2-Pin", Substitutable=DNP
R1 R3 R4 R5 R6 R7 R8 R9 R10 R14 R18 R22 R23 R24 R25 R26 R27 R28 R29: "Semiconductor Resistor", Rating=5%, Substitutable=yes
  R1 R3 R4 R5 R6 R7 R8 R9 R10 R14 R18 R22 R23 R24 R25 R27 R28 R29: PackageReference=0603
  R26: PackageReference=1206
R2: "Semiconductor Resistor", Rating=1%, Supplier Part Number 1=311-8.06KHRCT-ND, PackageReference=0603, Substitutable=yes, Supplier 1=Digi-Key
R11 R12 R13 R19 R20 R21: "Semiconductor Resistor", Rating=5%, Supplier Part Number 1=P10KGCT-ND, PackageReference=0603, Substitutable=yes, Supplier 1=Digi-Key
R15: "Semiconductor Resistor", Rating=1%, Supplier Part Number 1=P12.0KHCT-ND, PackageReference=0603, Substitutable=yes, Supplier 1=Digi-Key
R16 R17: "Semiconductor Resistor", Rating=5%, Supplier Part Number 1=P2.2KGCT-ND, PackageReference=0603, Substitutable=yes, Supplier 1=Digi-Key
SW1: library part KMS221G_LFS, Supplier Part Number 1=612-TL1105LF, PackageReference="4-pin thu-hole", Substitutable=no, Supplier 1=Mouser
TP1 TP2 TP3 TP4 TP5 TP6 TP7 TP8 TP9 TP10 TP11 TP12 TP13 TP14 TP15 TP16 TP17: library part "Test Pad", "PCB test point", Substitutable=DNP
U1: library part LM3670, "LM3670 buck step-down regulator, 350 mA", Supplier Part Number 1=926-LM3670MF33NOPB, PackageReference=SOT23-5, Substitutable=no, Supplier 1=Mouser
U2: "Spartan-6 LX 1.2V FPGA, 102 User I/Os, 144-Pin TQFP (0.5mm Pitch), Speed Grade 3, Commercial Grade, Pb-Free", Supplier Part Number 1=122-1745-ND, PackageReference=TQG144, Substitutable=no, Supplier 1=Digi-Key
U3: "256Mb Synchronous High-Speed CMOS DRAM, 16Mb x 16Bit x 4 Banks, 54-Pin TSOP Pb-free, Commercial", Supplier Part Number 1=557-1059-1-ND, PackageReference=TSOP2-54, Substitutable=no, Supplier 1=Digi-Key, Supplier 2=Arrow, Supplier Part Number 2=41315055S7057620N2406
U4: "Hi-Speed USB Transceiver with 1.8V-3.3V ULPI Interface - MHz Reference Clock", PackageReference=QFN-24, Substitutable=no
U5: library part OSC-4P, "Oscillator", PackageReference=3.2x2.5, Substitutable=no
U7: "FT2232H", Supplier Part Number 1=895-FT2232HL, PackageReference=QFP-64, Substitutable=no, Supplier 1=Mouser
U8: "1Kb (x8/x16) Serial Microwire Bus EEPROM", Supplier Part Number 1=556-A93C46DNSH-B, PackageReference=SOP8, Substitutable=no, Supplier 1=Mouser
U9: library part TLV1117, Supplier Part Number 1=296-28778-1-ND, PackageReference=SOT-223, Substitutable=no, Supplier 1=Digi-Key
Y1: library part XTAL, "Crystal Oscillator", PackageReference=HS-49, Substitutable=yes
Y2: library part XTAL, "Crystal Oscillator", Supplier Part Number 1=XC1289CT-ND, PackageReference=HS-49, Substitutable=yes, Supplier 1=Digi-Key

## Via types
v1: diameter 0.6, hole 0.3, Top Layer to Bottom Layer, 245 vias

## Nets (pads, with @x,y where several pads share a name; then routed paths per layer and width w, separated by ;. In a path a pad name is that pad's centre, name@x,y a point inside that pad or via, vN(x,y) a via of type N, cw(c..) or ccw(c..) an arc to the next point about the centre after c; other vN are vias at no path point)
+1.2V: C3.2 C19.2 C20.2 C21.2 C29.2 L5.1 P4.23 TP2.1 U2.19 U2.28 U2.52 U2.89 U2.128 | length 131.8
  Top Layer w0.305: C20.2@69.434,147.574 71.497,147.574 72.009,148.086 U2.19@73.27,148.086 74.926,148.086 ; C21.2@70.142,143.586 U2.28@73.27,143.586 75.108,143.586 ; 81.788,140.208 81.788,139.827 82.57,139.045 U2.52@82.57,137.786 ; C19.2@83.058,161.506 83.07,161.494 U2.128@83.07,158.886 83.07,157.468 83.566,156.972 ; 92.202,147.193 92.595,147.586 U2.89@94.37,147.586 98.321,147.586 C29.2@98.46,147.447
  Top Layer w0.508: C3.2@69.43,158.403 73.88,158.403 80.328,151.956 76.454,148.082 75.057,148.082 78.41,144.729 78.41,143.586 ; 75.108,143.586 78.41,143.586 ; 80.396,152.024 83.566,155.194 83.566,156.972 ; 92.202,147.193 88.773,147.193 86.868,145.288 ; v1(97.282,134.874) 96.698,135.458 L5.1@95.25,135.458 ; TP2.1@101,122 99.488,122 93.218,128.27 93.218,132.931 94.692,134.405 94.692,135.112 95.038,135.458 L5.1@95.25,135.458 ; v1@103.565,140.36 106.257,137.668 P4.23@108.204,137.668 ; 78.41,143.586 81.788,140.208 86.868,145.288 ; 86.868,145.288 95.123,137.033 95.123,135.585 L5.1@95.25,135.458
  Top Layer w1.27: C3.2@69.43,158.242 73.914,158.242 74.133,158.023
  Bottom Layer w0.508: v1(97.282,134.874) 98.099,134.874 v1(103.575,140.35)
+1.8V: C36.2 C52.2 C53.2 C54.2 U7.12 U7.37 U7.49 U7.64 | length 41
  Top Layer w0.254: 80.998,96.548 U7.12@80.998,98.565 ; 80.998,108.204 U7.37@80.998,109.715 80.998,111.44 81.026,111.468 C54.2@81.026,111.976
  Top Layer w0.305: C53.2@71.212,110.363 73.673,107.902 U7.49@73.673,107.89 75.244,107.89 76.454,106.68 80.998,106.68 ; C36.2@73.673,97.942 U7.64@73.673,100.39 74.658,100.39 75.48,101.212 80.652,101.212 80.998,100.866 ; 80.998,96.548 81.534,96.012 C52.2@84.798,96.012 ; U7.12@80.998,98.565 80.998,100.866 ; 80.998,108.204 80.998,106.68 ; 80.998,100.866 80.998,106.68